# EAGLE board untitled (EAGLE 6.1)
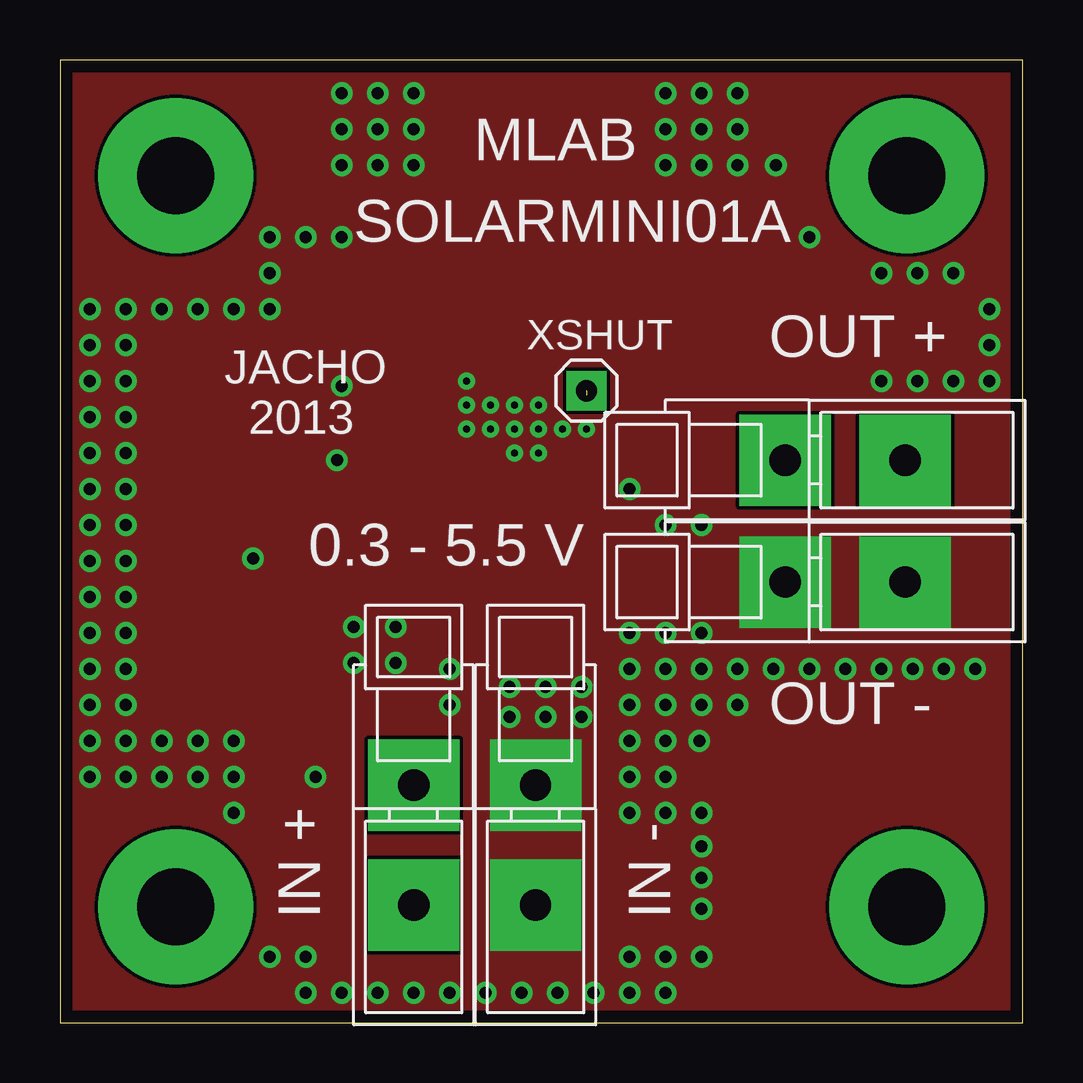
[diagram p0: board, top side]
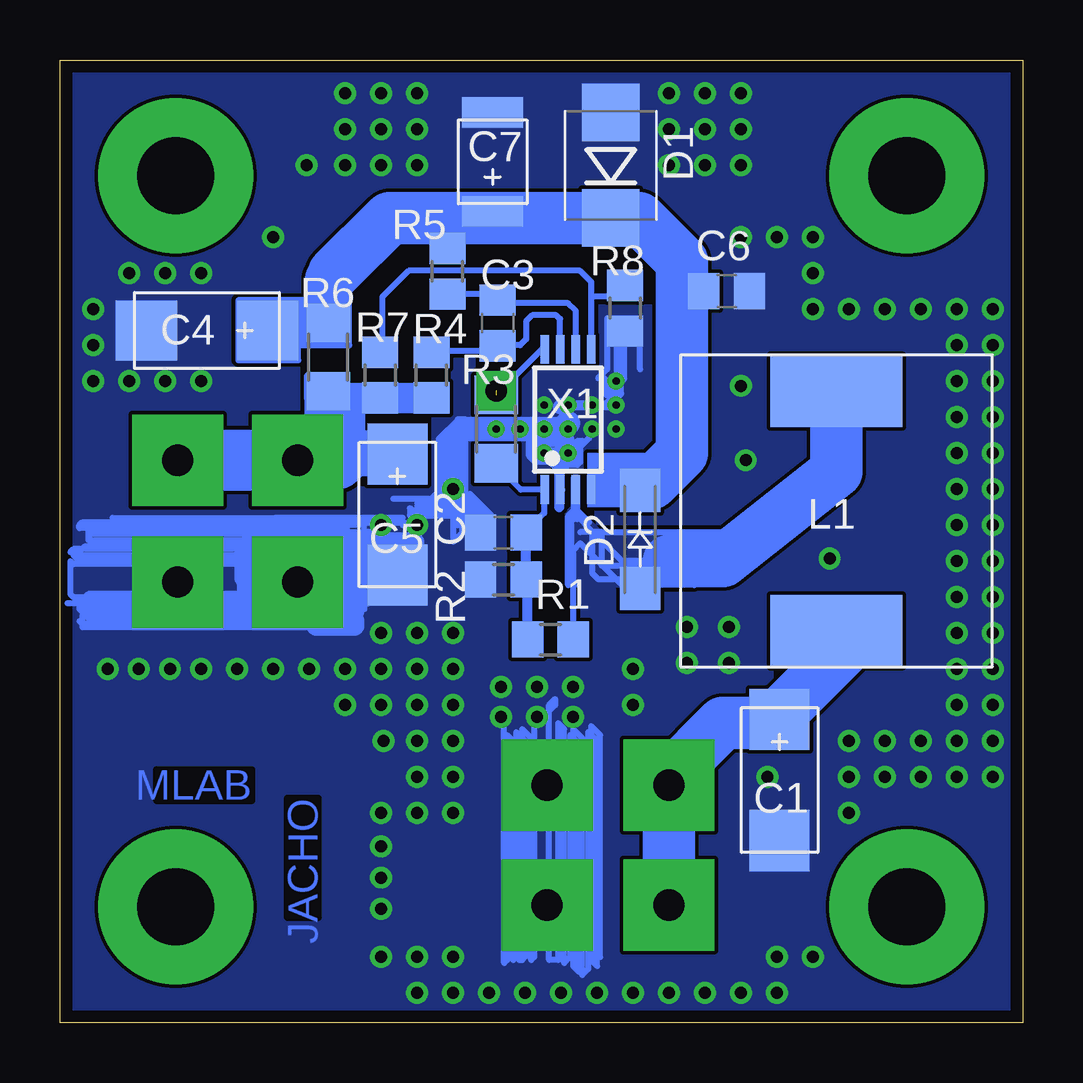
[diagram p1: board, bottom side, seen from below]

Size 40.13 x 40.13 mm. Coordinates in mm from the lower left corner, seen from the top.
Outline: 0,0 40.13,0 40.13,40.13 0,40.13 0,0
Copper layers (1*16): Top 0.035mm / dielectric 1.5mm / Bottom 0.035mm
Design rules: minimum track width 8mil, minimum drill 16mil, track to track 6mil, track to pad 6mil, pad to pad 6mil, via to via 6mil, smd to smd 6mil, copper to edge 20mil, drill to drill 8mil, minimum pad ring 10mil, minimum via ring 8mil, stop-mask expansion 4mil, vias tented up to drill 25mil, thermal gap 0mil

## Footprints (pad centres in the part's own frame; a part is rotated, then mirrored left to right if it is on the bottom)
C = smd 2.55 x 2.5: + 2.525,0; - -2.525,0
C0805 = smd 1.3 x 1.5: 1 -0.95,0; 2 0.95,0
B = smd 1.27 x 2.54: + 2.223,0; - -1.905,0
SMB = smd 2.4 x 2.4: A 2.2,0; K -2.2,0
SMA = smd 1.8 x 1.7: A -2.05,0; K 2.05,0
DE1205-10 = smd 3 x 5.5: P$1 -5,0; P$2 5,0
0805 = smd 1.3 x 1.5: 1 -0.95,0; 2 0.95,0
1206 = smd 1.6 x 1.803: 1 -1.422,0; 2 1.422,0
WAGO256 = drill 1.3 pad 3.81 square: 1 2.54,0; A1 -2.46,0
MA01-1 = drill 0.889 pad 1.651 square: 1 0,0
TSSOP8 = smd 0.35 x 1.2: 1 -0.975,-2.925; 2 -0.325,-2.925; 3 0.325,-2.925; 4 0.975,-2.925; 5 0.975,2.925; 6 0.325,2.925; 7 -0.325,2.925; 8 -0.975,2.925
SROUB3M = drill 3.2 pad 6.452: P$1 0,0

## Placement (x,y rotation side)
C1  47uF  [C]  10.14,10.12 90 bottom
C2  1nF  [C0805]  21.65,20.43 180 bottom
C3  1uF  [C0805]  21.89,29.17 90 bottom
C4  47uF  [C]  34.01,28.86 0 bottom
C5  47uF  [C]  26.07,21.19 90 bottom
C6  100nF  [C0805]  12.35,30.5 0 bottom
C7  10uF  [B]  22.1,36.05 270 bottom
D1  SMBJ5.0A  [SMB]  17.17,35.75 90 bottom
D2  15MQ040N  [SMA]  15.95,20.15 90 bottom
L1  10uH  [DE1205-10]  7.77,21.34 90 bottom
R1  1k  [0805]  19.69,15.97 0 bottom
R2  DNM  [0805]  21.65,18.47 0 bottom
R3  0R  [1206]  21.95,24.75 90 bottom
R4  1k  [0805]  24.65,27 270 bottom
R5  1k  [0805]  23.99,31.33 90 bottom
R6  0R  [1206]  28.95,27.75 270 bottom
R7  [0805]  26.79,27 270 bottom
R8  [0805]  16.58,29.79 90 bottom
SV1  [WAGO256]  14.75,7.37 90 top
SV2  [WAGO256]  19.83,7.37 90 top
SV3  [WAGO256]  32.77,23.45 180 top
SV4  [WAGO256]  32.77,18.37 180 top
SV5  [MA01-1]  21.95,26.35 0 top
X1  SPV1040  [TSSOP8]  18.96,25.15 0 bottom
X2  SROUB3M  [SROUB3M]  35.31,35.31 0 top
X3  SROUB3M  [SROUB3M]  35.31,4.83 0 top
X4  SROUB3M  [SROUB3M]  4.83,35.31 90 top
X5  SROUB3M  [SROUB3M]  4.83,4.83 0 top

## Library data of the parts
C1-C7 = moje_C
D1 D2 = moje_diody
L1 = moje_L
R1-R8 = moje_R
SV1-SV4 = moje_konektory
SV5 = moje_hrebinky
X1 = moje_io
X2-X5 = moje

## Nets
GND: C1.- C2.2 C4.- C5.- C6.2 C7.- D1.A R2.1 R8.1 SV2.1 SV2.A1 SV4.1 SV4.A1 X1.2
N$1: C1.+ L1.P$1 SV1.1 SV1.A1
N$2: R3.2 SV5.1 X1.8
N$3: C2.1 R1.1 R2.2 R3.1 X1.1
N$4: C3.1 R4.1 X1.7
N$5: C4.+ C6.1 C7.+ D1.K D2.K R5.2 R6.1 X1.4
N$6: D2.A L1.P$2 R1.2 X1.3
N$8: C5.+ R4.2 R6.2 R7.2 SV3.1 SV3.A1
N$9: C3.2 R5.1 X1.6
VCTRL: R7.1 R8.2 X1.5

## Tracks (layer width: path | path; a pad name or v marks a point on that pad's centre or on a via)
GND  (via drill 0.3, 0.5)
  Bottom 0.254: 30.95,20.62 39.32,20.62 39.32,20.75 39.2,20.87 30.2,20.87 30.07,20.75 30.7,20.75 31.07,20.37 38.82,20.37 38.95,20.5 38.95,20.12 30.7,20.12 | 30.45,20.12 30.7,20.12 | 30.7,20.12 31.07,19.75 39.57,19.75 39.7,19.62 39.32,19.62 39.07,19.87 30.45,19.87 30.2,19.62 30.7,19.62 30.95,19.37 39.45,19.37 39.57,19.5 30.95,19.5 30.82,19.37 | 17.62,2.75 17.62,12 18,12.37 18,2.62 17.75,2.37 17.75,11.75 18.12,12.12 18.12,2.25 18.37,2 18.37,11.87 18.75,12.25 18.75,2.37 18.5,2.12 18.5,11.62 18.87,12 18.87,2.75 19.12,2.5 19.12,12.25 19.37,12.5 19.37,2.62 19.75,2.62 19.75,13.25 19.5,13.5 19.5,13.25 20.37,12.37 20.37,2.75 20.5,2.62 20.5,11.87 20.87,12.25 20.87,2.75 21,2.62 20.87,2.62 20.62,2.87 20.62,11.62 21.12,12.12 21.12,2.75 21.25,2.62 21.25,11.75 21.5,12 21.5,2.62 21.62,2.5 21.62,12.62 | 30.7,19.12 39.57,19.12 39.7,19.25 39.7,17.87 39.57,17.75 39.07,17.75 | 38.7,17.75 32.35,17.75 28.45,17.75 28.32,17.87 | 31.07,17.87 38.95,17.87 39.07,17.75 | 39.07,17.75 38.7,17.75 | 38.7,17.75 38.45,17.5 38.95,17.5 39.07,17.62 30.57,17.62 30.45,17.5 39.32,17.5 | 39.82,17.5 39.32,17.5 | 39.32,17.5 39.2,17.37 30.82,17.37 30.57,17.12 39.07,17.12 39.32,17.37 39.32,17.25 38.95,16.87 29.57,16.87 29.45,17 39.2,17 39.2,16.5 29.32,16.5 29.2,16.62 39.2,16.62 39.32,16.75 | 18.07,24.5 18.07,24.37 18.45,24 18.45,23.37 18.57,23.25 18.95,23.25 19.2,23 19.32,23 19.45,23 19.45,23.12 19.7,23.37 20.32,23.37 20.57,23.62 20.57,24.62 20.45,24.62 19.57,23.75 | 19.57,23.75 19.2,23.37 | 19.2,23.37 19.07,23.25 18.82,23.5 18.7,23.5 | 18.7,23.5 18.57,23.37 18.57,24 18.32,24.25 18.57,24.25 18.82,24 18.82,23.87 18.7,23.75
  Bottom 0.254: 15.95,27.25 15.95,28.5 16.07,28.62 | 17.32,29.37 17.32,27.25 17.57,27 | 17.7,26.87 17.57,27 | 17.32,26.25 17.32,26.75 17.57,27 | 18.82,23.62 18.7,23.62 18.7,23.5 | 19.2,23.37 19.07,23.37 | 18.95,23.5 18.82,23.62 | 18.82,23.62 18.82,23.75 | 18.82,24.37 18.82,23.75 | 18.82,23.75 18.95,23.62 | 18.95,24.25 v18.95,23.75 | v18.95,23.75 18.95,23.62 | 18.95,23.62 19.07,23.5 | 19.07,23.5 20.2,23.5 20.45,23.75 20.45,23.87 | 20.45,23.87 20.45,24 20.32,24.12 20.2,24.12 | 19.32,24.12 20.2,24.12 | 20.2,24.12 20.45,23.87 | 20.45,23.87 19.32,23.87 19.2,24 19.32,24 19.57,23.75 | 19.57,23.75 v19.95,23.75 20.32,23.75 20.45,23.62 | 19.07,23.5 19.07,24.25 | 19.07,24.25 20.45,24.25 | 18.95,25 v18.95,24.75 v18.95,23.75 | v18.95,23.75 18.95,23.5 | 18.95,23.5 19.07,23.37 | 19.07,23.37 19.07,23.5 | 19.07,24.25 19.07,25.37 19.32,25.62 | 19.45,25.62 19.32,25.62 | 19.28,25.66 19.32,25.62 | 30.95,20.85 25.75,20.85 25.75,20.75 25.85,20.75 25.85,21.05 31.15,21.05 | 37.95,21.05 31.15,21.05 | 31.15,21.05 31.15,20.75 | 31.15,20.55 31.15,20.45 27.45,20.45 | 27.05,20.45 27.45,20.45 | 27.45,20.45 27.45,20.75 31.15,20.75 | 31.15,20.75 31.15,20.55 | 31.15,20.55 28.15,20.55 28.15,20.35 31.75,20.35 31.75,20.15 27.05,20.15 27.05,20.05 32.05,20.05 32.05,19.95 27.25,19.95 27.25,19.75 32.15,19.75 32.15,19.55 27.25,19.55 27.25,19.35 | 27.25,19.35 27.25,19.25 32.05,19.25 32.05,19.15 31.95,19.15 31.95,19.35 27.35,19.35 | 27.25,19.35 27.35,19.35 | 27.35,19.35 27.35,18.95 27.45,18.95 | 27.45,18.95 31.45,18.95 | 31.65,18.95 31.45,18.95 | 31.45,18.95 31.45,19.15 27.45,19.15 27.45,18.95 | 27.45,18.95 27.45,17.25 | 23.25,24.45 23.25,22.05 23.05,22.05 22.15,21.15 22.45,21.15 23.05,21.75 23.05,21.55 22.75,21.25 23.25,21.25 23.25,25.15 23.55,25.15 24.35,24.35 24.35,22.15 24.65,21.85 24.45,21.85 24.15,22.15
  Bottom 0.254: 24.15,22.15 24.15,24.25 23.55,24.85 23.55,24.55 23.95,24.15 23.95,22.25 v23.75,22.25 | v23.75,22.25 23.75,22.65 | 23.75,22.65 23.75,24.15 23.55,24.35 23.55,22.25 23.65,22.15 23.55,22.15 | 23.55,22.15 23.35,22.35 23.35,24.45 23.45,24.55 | 26.25,21.85 24.55,21.85 24.45,21.95 | 24.45,21.95 23.75,22.65 | v23.75,22.25 23.75,20.05 23.35,20.45 23.35,20.85 | 23.35,21.25 23.35,22.05 | 23.35,22.25 23.35,22.05 | 23.35,22.05 23.15,21.85 23.15,21.35 23.85,21.35 | 24.15,21.35 25.45,21.35 25.55,21.45 25.55,21.15 23.45,21.15 23.35,21.25 | 23.35,21.25 23.35,20.85 | 23.35,20.85 23.45,20.75 23.45,20.85 23.65,21.05 23.65,20.85 23.55,20.75 23.55,22.15 | 23.55,22.15 23.65,22.25 24.05,22.25 | 24.05,22.25 24.15,22.15 | 24.15,22.15 24.15,21.35 | 24.15,21.35 23.85,21.35 | 23.85,21.35 23.85,22.05 24.05,22.25 | 24.05,22.25 24.05,21.85 | 24.05,21.85 24.05,21.75 23.95,21.65 24.25,21.65 | 25.25,21.65 24.25,21.65 | 24.25,21.65 24.05,21.85 | 24.05,21.85 24.35,21.85 | 24.35,21.85 24.45,21.95 | 24.35,21.85 24.05,21.55 25.25,21.55
  Bottom 0.406: 19.2,24.75 19.28,24.66 X1.2 19.28,22.96 19.32,23 | 19.2,25.75 v18.95,25.75 v17.95,25.75 17.32,25.75 16.82,26.25 16.82,28.62 | 16.82,28.62 16.57,28.87 | 16.82,28.62 16.07,28.62 | 16.82,28.62 16.82,28.75 16.7,28.87 16.7,26.87 17.32,26.25
  Bottom 0.61: 19.28,25.66 19.2,25.75
  Bottom 0.813: 25.35,20.05 27.85,20.05 27.85,19.85 32.45,19.85 32.45,18.55 26.75,18.55 26.75,18.45 32.35,18.45 32.35,17.75 27.35,17.75 27.35,17.85 27.85,17.85 27.85,17.15 29.65,17.15 29.65,17.05 29.45,17.05 29.45,16.55 27.85,16.55 27.85,16.75
  Bottom 1.016: 23.2,24.75 v21.95,24.75 v20.95,24.75 v19.95,24.75 19.2,24.75 18.95,25
  other vias: 16.95,26.75 16.95,25.75 16.95,24.75 17.95,24.75 19.95,25.75 1.25,10.25 1.25,11.75 1.25,13.25 1.25,14.75 1.25,16.25 1.25,17.75 1.25,19.25 2.75,10.25 2.75,11.75 2.75,13.25 2.75,14.75 2.75,16.25 2.75,17.75 2.75,19.25 18.75,14 18.75,12.75 20.25,14 21.75,14 20.25,12.75 21.75,12.75 16.25,13.25 16.25,14.75 14,15 12.25,16.5 14,16.5 12.25,15 2.75,20.75 2.75,22.25 2.75,23.75 2.75,25.25 2.75,26.75 2.75,28.25 2.75,29.75 4.25,29.75 5.75,29.75 7.25,29.75 8.75,29.75 8.75,31.25 8.75,32.75 10.25,32.75 11.75,32.75 14.75,35.75 14.75,37.25 14.75,38.75 13.25,38.75 13.25,37.25 13.25,35.75 11.75,35.75 11.75,37.25 11.75,38.75 25.25,38.75 25.25,37.25 25.25,35.75 26.75,35.75 26.75,37.25 26.75,38.75 28.25,38.75 28.25,37.25 28.25,35.75 34.25,31.25 31.25,32.75 29.85,35.75 35.75,31.25 37.25,31.25 38.75,29.75 38.75,28.25 38.75,26.75 37.25,26.75 35.75,26.75 34.25,26.75 23.75,16.25 25.25,16.25 26.75,16.25 26.75,14.75 25.25,14.75 23.75,14.75 23.75,13.25 25.25,13.25 26.75,13.25 28.25,13.25 28.25,14.75 29.75,14.75 35.55,14.75 31.25,14.75 32.75,14.75 26.65,11.75 38.15,14.75 36.85,14.75 34.25,14.75 23.75,11.75 23.75,10.25 23.75,11.75 23.75,8.75 23.75,2.75 25.25,11.75 25.25,10.25 25.25,8.75 25.25,2.75 13.25,1.25 14.75,1.25 17.75,1.25 16.25,1.25 19.25,1.25 20.75,1.25 23.75,1.25 22.25,1.25 25.25,1.25 7.25,11.75 7.25,10.25 7.25,8.75 10.65,10.25 10.25,2.75 8.75,2.75 10.25,1.25 11.75,1.25 25.25,20.75 26.75,20.75 5.75,11.75 4.25,11.75 4.25,10.25 5.75,10.25 1.25,20.75 1.25,22.25 1.25,23.75 1.25,25.25 1.25,26.75 1.25,28.25 1.25,29.75 11.55,23.45 11.75,26.55 8.05,19.35 26.75,8.75 26.75,7.35 26.75,6.05 26.75,4.75 26.75,2.75
  pour Bottom: -0.25,41.75 -0.5,41.75 -0.5,-0.25 40.5,41.5 -0.25,41.5
  pour Top: -0.25,-0.38 40.12,-0.38 40.37,-0.13 40.37,40.25 -0.25,40.25 -0.38,41.62 -0.38,-0.25
  pour Bottom: -0.15,40.35 -0.15,-0.35 40.25,-0.35 40.25,40.45 -0.15,40.45
N$1
  Bottom 2.184: SV1.A1 SV1.1 14.74,10.26 12.5,12.5 10.5,12.5 10.25,12.75 10.24,12.75 | 10.24,12.75 C1.+ | 10.24,12.75 6.75,16.25 7.68,16.25 L1.P$1
N$2  (1 unrouted)
  Bottom 0.254: X1.8 20.04,28.07 R3.2
N$3
  Bottom 0.254: 20.7,20.5 19.95,21.25 X1.1 20.92,22.22 21.95,23.25 R3.1
  Bottom 0.406: 21.95,23.5 R3.1 | 20.7,20.5 C2.1 R2.2 20.64,18.41 R1.1
N$4
  Bottom 0.254: X1.7 19.28,29.33 19.45,29.5 20.45,29.5 20.7,29.25 20.7,28.5 20.95,28.25 21.7,28.25 21.95,28 | 21.95,28 24.6,28 R4.1 | 21.95,28 21.91,28 C3.1
N$5
  Bottom 0.254: C4.+ 31.56,28.86 31.95,29.25 | 16.2,22.5 17.7,22.5 X1.4
  Bottom 0.813: R5.2 23.89,33.36 23.7,33.55 | D2.K 15.95,22.25 16.2,22.5 | C7.+ 22.97,33.82 23.25,33.55 | C6.1 13.45,30.5 14.2,31.25
  Bottom 1.93: R6.1 28.95,29.25 | 28.95,29.25 28.95,31 28.7,31.25 | 28.95,29.25 31.09,29.25 C4.+
  Bottom 2.184: 16.2,22.5 15.45,22.5 14.2,23.75 14.2,31.25 14.2,31.75 16,33.55 D1.K 23.25,33.55 23.7,33.55 26.4,33.55 28.7,31.25
N$6
  Bottom 0.254: 17.95,20.5 16.7,19.25 14.75,19.25 14.45,19.25 13.82,19.87 13.95,20 13.82,20 14.07,20.25 14.32,20.25 | 18.63,21.18 18.7,21.25 | 18.7,21.37 18.7,22.75 18.57,22.75 18.57,21.37 | R1.2 18.74,19.71 18.45,20 16.7,18.25 13.7,18.25 13.95,18.5 17.7,18.5 17.95,18.75 17.95,20.5 | X1.3 18.63,21.18 | 18.63,21.18 17.95,20.5 | 18.7,21 18.7,21.25 | 18.57,21.37 18.57,21 | 18.07,20.87 18.57,21.37 | 18.57,21.37 18.7,21.37 | 18.7,21.37 18.95,21.12 18.95,20.75 | 18.7,21.25 18.7,21.37 | 18.7,18.25 18.95,18.25 18.95,20.75 | 18.95,20.75 18.82,20.87 18.82,19.87 | 14.85,19.05 17.55,19.05 17.55,20.45 | 17.55,20.45 18.45,20.45 | 17.55,20.45 12.05,20.45 12.05,20.25
  Bottom 2.184: L1.P$2 7.77,22.98 12.5,19.25 14.75,19.25
  pour Bottom: 18.7,21.5 17.45,20.25 14.2,20.25 13.95,20 13.95,18.25 18.7,18.25 18.95,18.5 18.95,21.25
N$7
  Bottom 0.406: 19.32,23.62 19.32,21.5
N$8
  Bottom 0.254: 29.82,26 29.45,26 29.27,26 R6.2 | 29.82,26 29.82,24.37 | 29.82,26 29.82,27
  Bottom 0.61: 28.32,25.62 28.32,25.7 R6.2 | 29.45,24.25 29.45,26
  Bottom 1.27: R4.2 R7.2 28.67,26.05 R6.2
  Bottom 1.93: C5.+ 28.37,23.75 28.37,25.58 28.32,25.62
  Bottom 2.54: SV3.A1 SV3.1 28.63,23.48 28.37,23.75
N$9
  Bottom 0.254: X1.6 18.63,29.68 18.95,30 21.81,30 C3.2 22.15,30.38 R5.1 23.73,29.92
N$12
  Bottom 0.254: 30.32,28.25 28.07,28.25 28.07,30.75
N$13
  Bottom 0.254: 29.82,30.12 32.7,30.12 32.7,27.62 30.2,27.62 30.2,28.37 | 28.2,28.37 30.2,28.37 | 30.2,28.37 30.45,28.37
VCTRL
  Bottom 0.254: X1.5 17.98,30.28 | 26.45,27.95 R7.1 26.75,27.95 26.7,28 26.7,30.25 25.6,31.35 18.45,31.35 17.98,30.88 17.98,30.28 | 17.98,30.28 17.03,30.28 R8.2
(copper drawn outside any net)
  shapes: Bottom area x1

## Text on the board
Bottom: MLAB | JACHO
tPlace: MLAB | SOLARMINI01A | XSHUT | OUT + | JACHO | 2013 | 0.3 - 5.5 V | OUT - | IN + | IN -